# EAGLE board LilyPad-E-Sewing-Kit_Panel_v14 (EAGLE 7.5.0), part 1 of 2
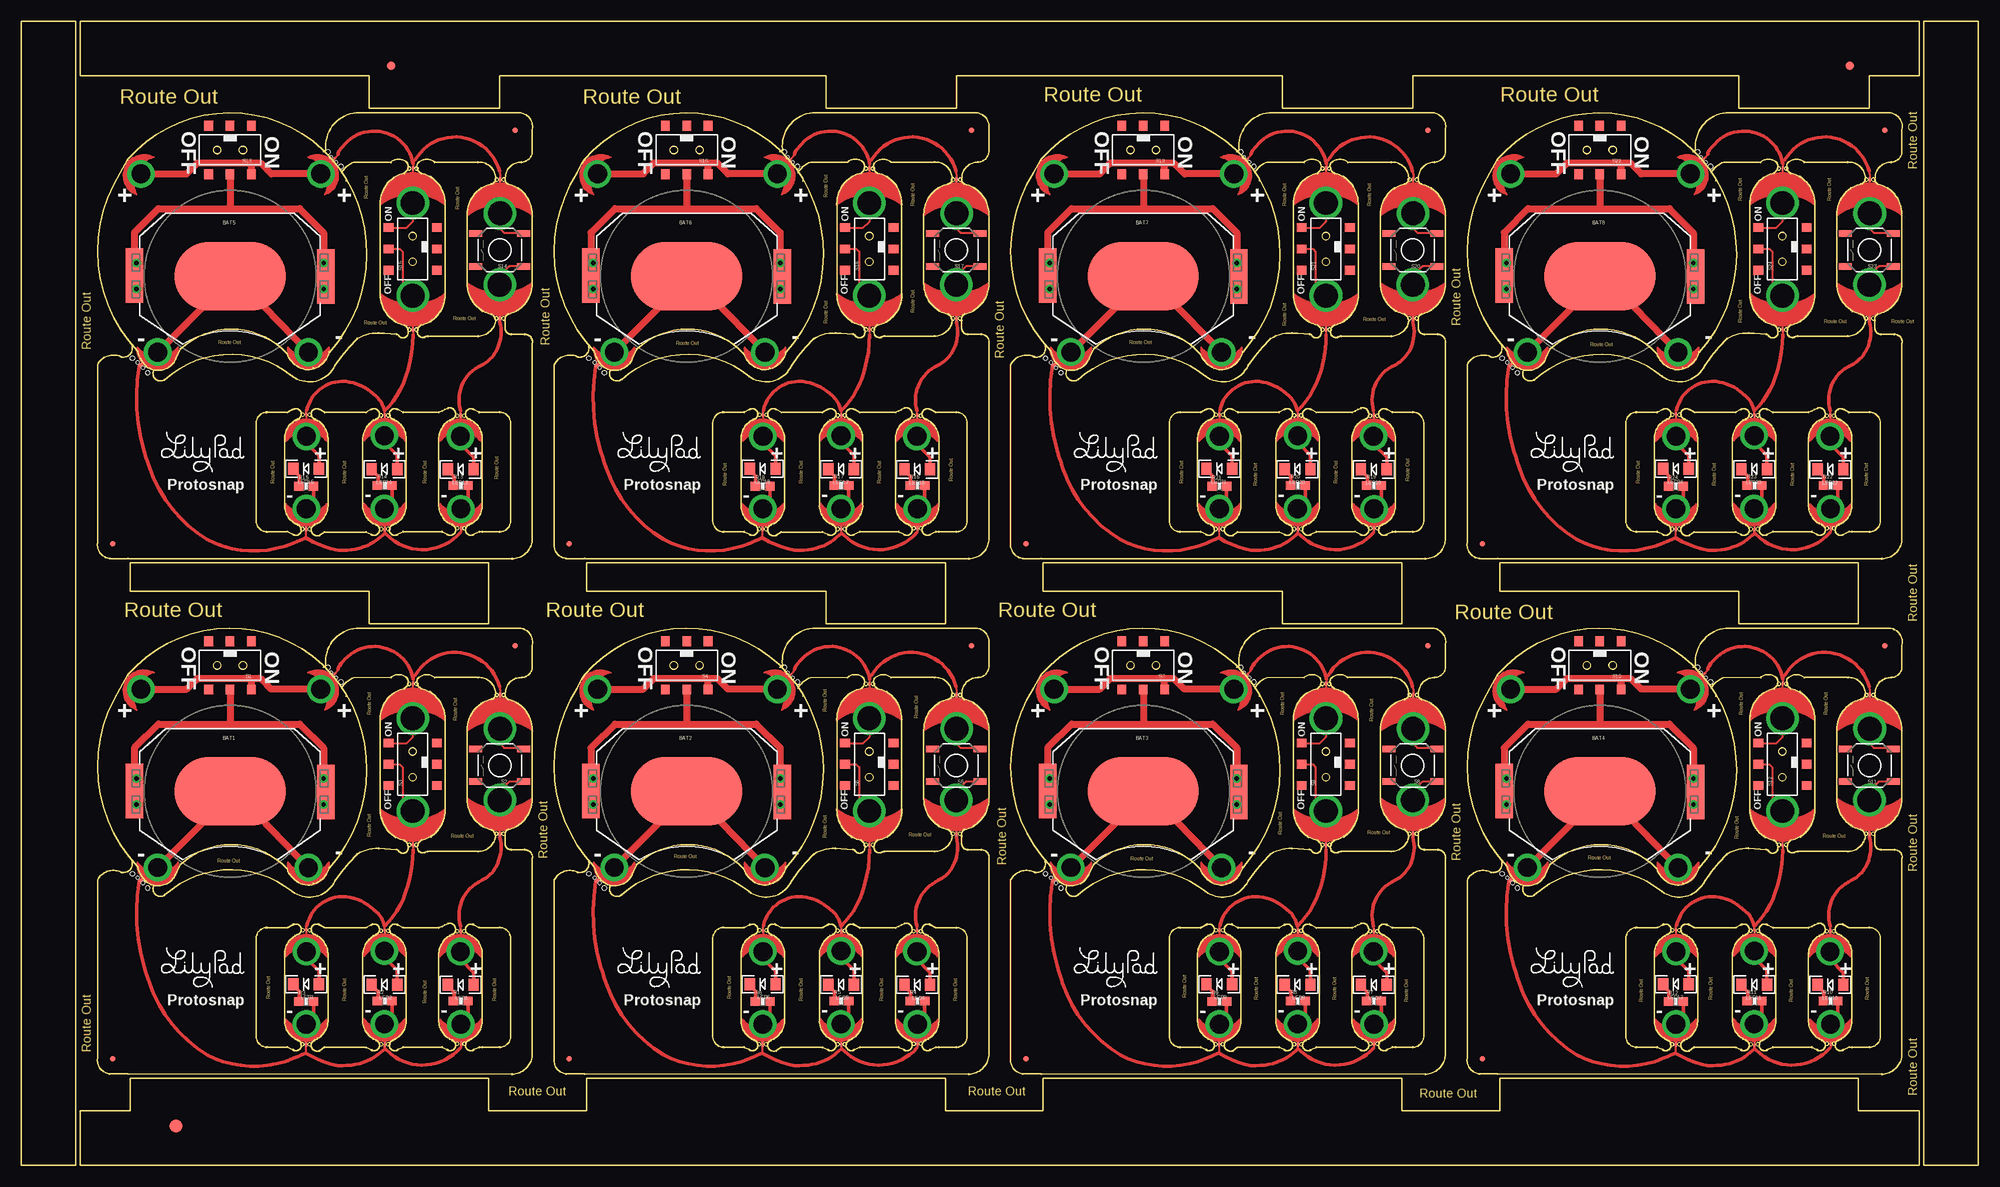
[diagram p0: board, top side]
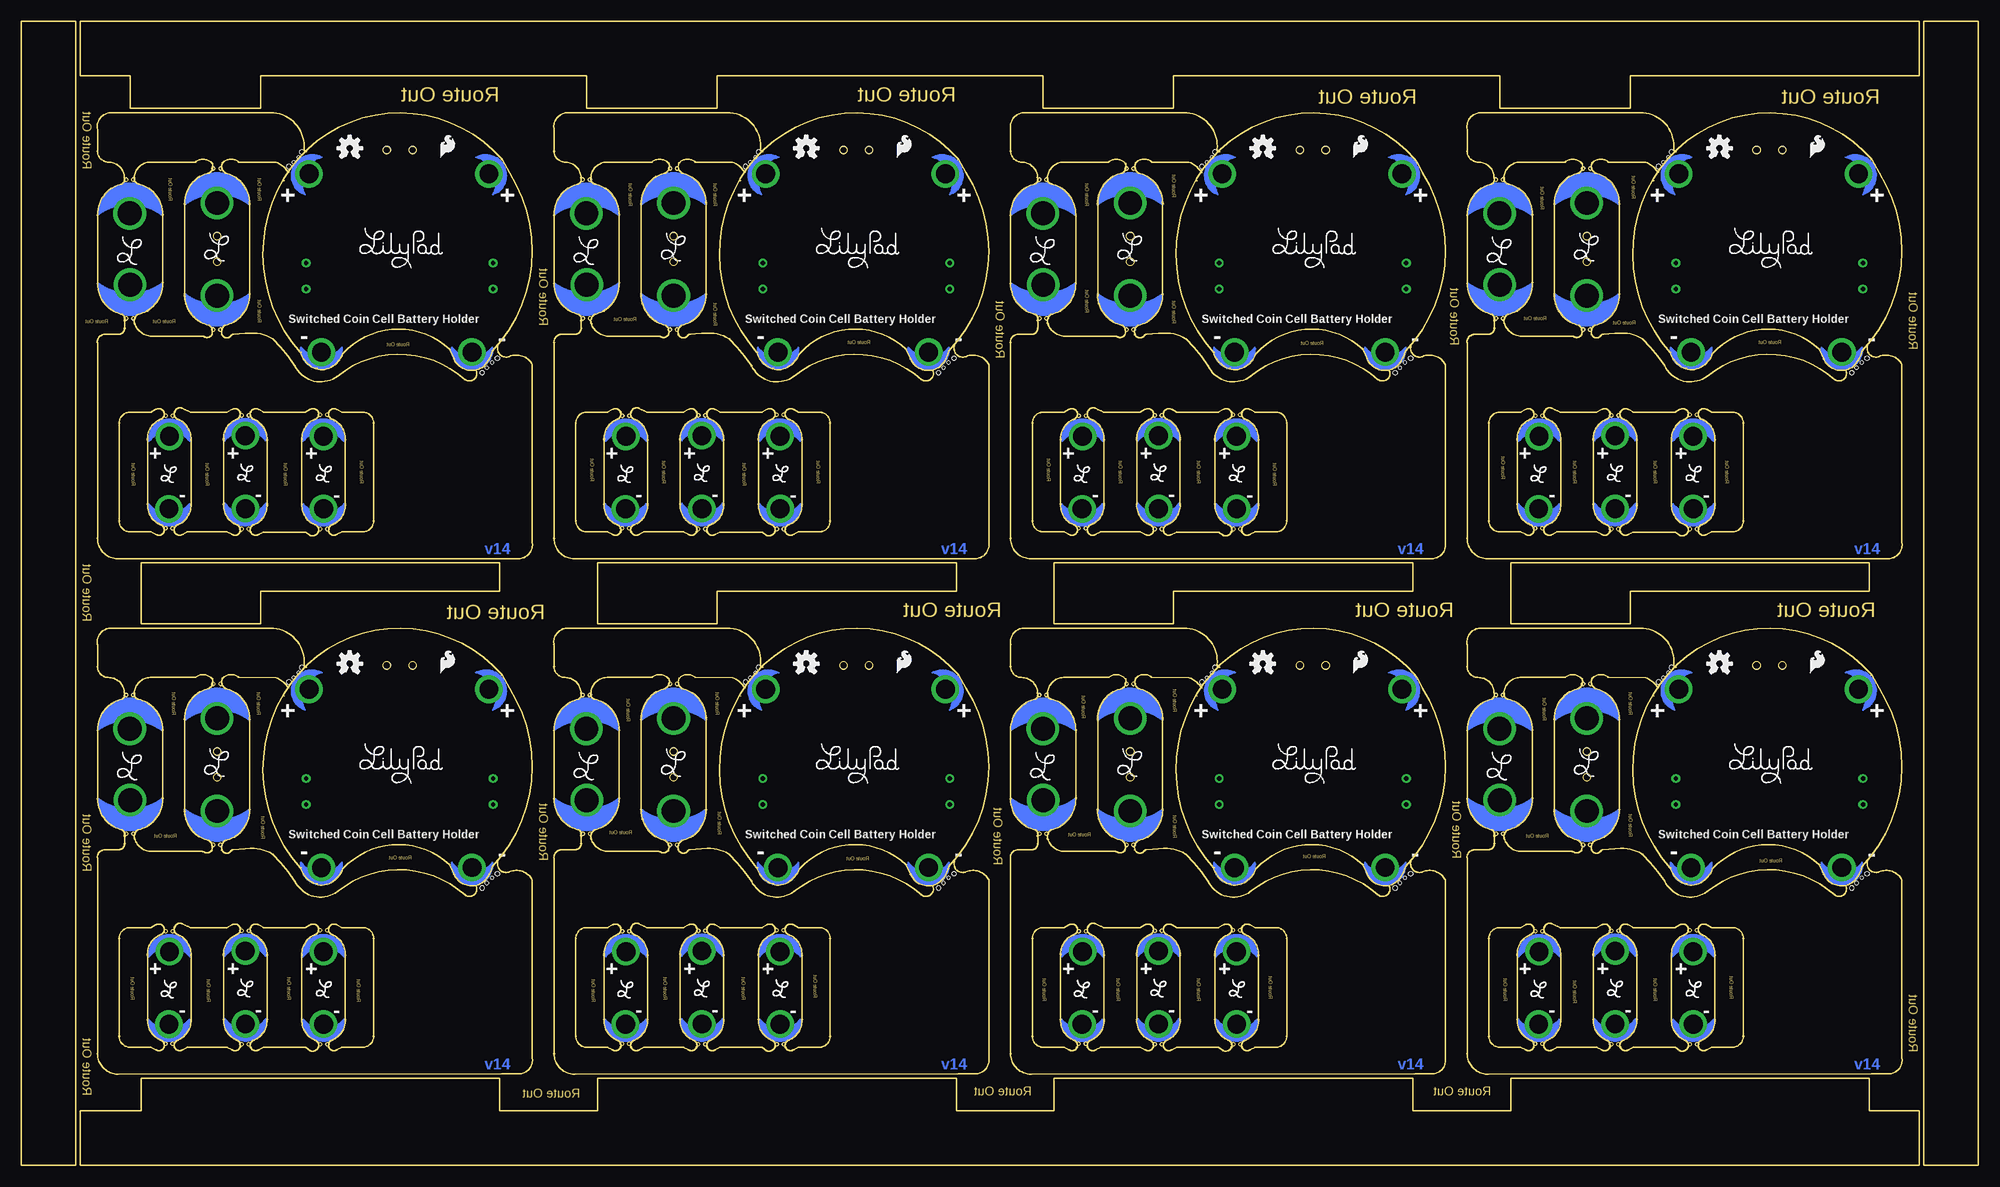
[diagram p1: board, bottom side, seen from below]

Size 228.6 x 133.6 mm. Coordinates in mm from the lower left corner, seen from the top.
Outline: 8671 segments
Outline: circle at 45.31,56.21 radius 0.19
Outline: circle at 46.15,56.21 radius 0.19
Outline: circle at 55.52,54.91 radius 0.19
Outline: circle at 56.36,54.91 radius 0.19
Outline: circle at 50.88,27.36 radius 0.19
Outline: circle at 51.71,27.36 radius 0.19
Outline: circle at 41.99,27.38 radius 0.19
Outline: circle at 42.82,27.38 radius 0.19
Outline: circle at 32.87,27.46 radius 0.19
Outline: circle at 33.71,27.46 radius 0.19
Outline: circle at 33.66,14.12 radius 0.19
Outline: circle at 32.82,14.12 radius 0.19
Outline: circle at 42.85,14.12 radius 0.19
Outline: circle at 42.01,14.12 radius 0.19
Outline: circle at 51.74,14.2 radius 0.19
Outline: circle at 50.9,14.2 radius 0.19
Outline: circle at 56.31,38.71 radius 0.19
Outline: circle at 55.47,38.71 radius 0.19
Outline: circle at 46.18,37.41 radius 0.19
Outline: circle at 45.34,37.41 radius 0.19
Copper layers (1*16): Top 0.035mm / dielectric 1.5mm / Bottom 0.035mm
Design rules "SparkFun-2-layer-STANDARD *": minimum track width 10mil, minimum drill 20mil, track to track 10mil, track to pad 8mil, pad to pad 8mil, via to via 10mil, smd to smd 8mil, copper to edge 8mil, drill to drill 8mil, minimum pad ring 10mil, minimum via ring 10mil, stop-mask expansion 4mil, vias tented up to drill 25mil, thermal gap 10mil
Net classes: 1 VCC: width 0.203 mm
Holes 0.51 mm at 12.96,34.05 14.77,32.37 35.81,58.14 37.32,56.45 66.3,34.05 68.11,32.37 89.15,58.14 90.66,56.45 119.64,34.05 121.45,32.37 142.49,58.14 144,56.45 172.98,34.05 174.79,32.37 195.83,58.14 197.34,56.45 12.96,94.25 14.77,92.57 35.81,118.34 37.32,116.65 66.3,94.25 68.11,92.57 89.15,118.34 90.66,116.65 119.64,94.25 121.45,92.57 142.49,118.34 144,116.65 172.98,94.25 174.79,92.57 195.83,118.34 197.34,116.65

## Footprints (pad centres in the part's own frame; a part is rotated, then mirrored left to right if it is on the bottom)
BATTCON_20MM_4LEGS = smd 13 x 8: NEGATIVE 0,0 | smd 2.032 x 3.175: POSITIVE@1 -11.176,1.651; POSITIVE@2 -11.176,-1.524; POSITIVE@3 11.176,1.524; POSITIVE@4 11.176,-1.651
PETAL-SMALL-2SIDE = drill 2.2: 1 0,0
PETAL-MEDIUM-2SIDE = drill 2.794: 1 0,-0.254
FIDUCIAL-1.5X3 = smd 1.5 x 1.5: 1 0,0
FIDUCIAL-1X2 = smd 1 x 1: 1 0,0
MICRO-FIDUCIAL = smd 0.635 x 0.635: 1 0,0
LED-1206 = smd 1.2 x 1.4: A -1.5,0; C 1.5,0
MOUST-BITE-1-(2_HOLES) = smd 0.203 x 0.508 bottom: P$1 -0.013,0 | hole 0.381: -0.432,0; 0.406,0
0603-RES = smd 1.1 x 1: 1 -0.85,0; 2 0.85,0
AYZ0202 = smd 1 x 1.15: 1 -2.5,2.825; 2 0,2.825; 3 2.5,2.825; 4 -2.5,-2.825; 5 0,-2.825; 6 2.5,-2.825 | hole 0.85: 1.5,0; -1.5,0
TACTILE-SWITCH-SMD = smd 1.524 x 0.762: 1 -2.794,1.905; 2 2.794,1.905; 3 -2.794,-1.905; 4 2.794,-1.905

## Placement (x,y rotation side)
BAT1  20mm coincell  [BATTCON_20MM_4LEGS]  24.38,43.66 0 top
BAT2  20mm coincell  [BATTCON_20MM_4LEGS]  77.72,43.66 0 top
BAT3  20mm coincell  [BATTCON_20MM_4LEGS]  131.06,43.66 0 top
BAT4  20mm coincell  [BATTCON_20MM_4LEGS]  184.4,43.66 0 top
BAT5  20mm coincell  [BATTCON_20MM_4LEGS]  24.38,103.86 0 top
BAT6  20mm coincell  [BATTCON_20MM_4LEGS]  77.72,103.86 0 top
BAT7  20mm coincell  [BATTCON_20MM_4LEGS]  131.06,103.86 0 top
BAT8  20mm coincell  [BATTCON_20MM_4LEGS]  184.4,103.86 0 top
BATB-  SEWTAP6  [PETAL-SMALL-2SIDE]  15.93,34.77 0 top
BATB-1  SEWTAP6  [PETAL-SMALL-2SIDE]  69.27,34.77 0 top
BATB-2  SEWTAP6  [PETAL-SMALL-2SIDE]  33.53,34.76 0 top
BATB-3  SEWTAP6  [PETAL-SMALL-2SIDE]  86.87,34.76 0 top
BATB-4  SEWTAP6  [PETAL-SMALL-2SIDE]  122.61,34.77 0 top
BATB-5  SEWTAP6  [PETAL-SMALL-2SIDE]  140.21,34.76 0 top
BATB-6  SEWTAP6  [PETAL-SMALL-2SIDE]  175.95,34.77 0 top
BATB-7  SEWTAP6  [PETAL-SMALL-2SIDE]  193.55,34.76 0 top
BATB-8  SEWTAP6  [PETAL-SMALL-2SIDE]  15.93,94.97 0 top
BATB-9  SEWTAP6  [PETAL-SMALL-2SIDE]  33.53,94.96 0 top
BATB-10  SEWTAP6  [PETAL-SMALL-2SIDE]  69.27,94.97 0 top
BATB-11  SEWTAP6  [PETAL-SMALL-2SIDE]  86.87,94.96 0 top
BATB-12  SEWTAP6  [PETAL-SMALL-2SIDE]  122.61,94.97 0 top
BATB-13  SEWTAP6  [PETAL-SMALL-2SIDE]  140.21,94.96 0 top
BATB-14  SEWTAP6  [PETAL-SMALL-2SIDE]  175.95,94.97 0 top
BATB-15  SEWTAP6  [PETAL-SMALL-2SIDE]  193.55,94.96 0 top
BATT+  SEWTAP6  [PETAL-SMALL-2SIDE]  13.97,55.6 245 top
BATT+1  SEWTAP6  [PETAL-SMALL-2SIDE]  67.31,55.6 245 top
BATT+2  SEWTAP6  [PETAL-SMALL-2SIDE]  34.98,55.6 115 top
BATT+3  SEWTAP6  [PETAL-SMALL-2SIDE]  88.32,55.6 115 top
BATT+4  SEWTAP6  [PETAL-SMALL-2SIDE]  120.65,55.6 245 top
BATT+5  SEWTAP6  [PETAL-SMALL-2SIDE]  141.66,55.6 115 top
BATT+6  SEWTAP6  [PETAL-SMALL-2SIDE]  173.99,55.6 245 top
BATT+7  SEWTAP6  [PETAL-SMALL-2SIDE]  195,55.6 115 top
BATT+8  SEWTAP6  [PETAL-SMALL-2SIDE]  13.97,115.8 245 top
BATT+9  SEWTAP6  [PETAL-SMALL-2SIDE]  34.98,115.8 115 top
BATT+10  SEWTAP6  [PETAL-SMALL-2SIDE]  67.31,115.8 245 top
BATT+11  SEWTAP6  [PETAL-SMALL-2SIDE]  88.32,115.8 115 top
BATT+12  SEWTAP6  [PETAL-SMALL-2SIDE]  120.65,115.8 245 top
BATT+13  SEWTAP6  [PETAL-SMALL-2SIDE]  141.66,115.8 115 top
BATT+14  SEWTAP6  [PETAL-SMALL-2SIDE]  173.99,115.8 245 top
BATT+15  SEWTAP6  [PETAL-SMALL-2SIDE]  195,115.8 115 top
BUTTON-  SEWTAP8  [PETAL-MEDIUM-2SIDE]  55.92,50.73 180 top
BUTTON-1  SEWTAP8  [PETAL-MEDIUM-2SIDE]  109.26,50.73 180 top
BUTTON-2  SEWTAP8  [PETAL-MEDIUM-2SIDE]  162.6,50.73 180 top
BUTTON-3  SEWTAP8  [PETAL-MEDIUM-2SIDE]  215.94,50.73 180 top
BUTTON-4  SEWTAP8  [PETAL-MEDIUM-2SIDE]  55.92,110.93 180 top
BUTTON-5  SEWTAP8  [PETAL-MEDIUM-2SIDE]  109.26,110.93 180 top
BUTTON-6  SEWTAP8  [PETAL-MEDIUM-2SIDE]  162.6,110.93 180 top
BUTTON-7  SEWTAP8  [PETAL-MEDIUM-2SIDE]  215.94,110.93 180 top
BUTTONS  SEWTAP8  [PETAL-MEDIUM-2SIDE]  55.88,42.9 0 top
BUTTONS1  SEWTAP8  [PETAL-MEDIUM-2SIDE]  109.22,42.9 0 top
BUTTONS2  SEWTAP8  [PETAL-MEDIUM-2SIDE]  162.56,42.9 0 top
BUTTONS3  SEWTAP8  [PETAL-MEDIUM-2SIDE]  215.9,42.9 0 top
BUTTONS4  SEWTAP8  [PETAL-MEDIUM-2SIDE]  55.88,103.1 0 top
BUTTONS5  SEWTAP8  [PETAL-MEDIUM-2SIDE]  109.22,103.1 0 top
BUTTONS6  SEWTAP8  [PETAL-MEDIUM-2SIDE]  162.56,103.1 0 top
BUTTONS7  SEWTAP8  [PETAL-MEDIUM-2SIDE]  215.9,103.1 0 top
E$1  [FIDUCIAL-1.5X3]  18.03,4.57 0 top
E$7  [FIDUCIAL-1X2]  213.61,128.4 90 top
E$8  [FIDUCIAL-1X2]  43.18,128.4 270 top
FD1  FIDUCIALUFIDUCIAL  [MICRO-FIDUCIAL]  57.66,60.68 0 top
FD2  FIDUCIALUFIDUCIAL  [MICRO-FIDUCIAL]  10.67,12.42 0 top
FD3  FIDUCIALUFIDUCIAL  [MICRO-FIDUCIAL]  111,60.68 0 top
FD4  FIDUCIALUFIDUCIAL  [MICRO-FIDUCIAL]  64.01,12.42 0 top
FD5  FIDUCIALUFIDUCIAL  [MICRO-FIDUCIAL]  164.34,60.68 0 top
FD6  FIDUCIALUFIDUCIAL  [MICRO-FIDUCIAL]  117.35,12.42 0 top
FD7  FIDUCIALUFIDUCIAL  [MICRO-FIDUCIAL]  217.68,60.68 0 top
FD8  FIDUCIALUFIDUCIAL  [MICRO-FIDUCIAL]  170.69,12.42 0 top
FD9  FIDUCIALUFIDUCIAL  [MICRO-FIDUCIAL]  57.66,120.88 0 top
FD10  FIDUCIALUFIDUCIAL  [MICRO-FIDUCIAL]  10.67,72.62 0 top
FD11  FIDUCIALUFIDUCIAL  [MICRO-FIDUCIAL]  111,120.88 0 top
FD12  FIDUCIALUFIDUCIAL  [MICRO-FIDUCIAL]  64.01,72.62 0 top
FD13  FIDUCIALUFIDUCIAL  [MICRO-FIDUCIAL]  164.34,120.88 0 top
FD14  FIDUCIALUFIDUCIAL  [MICRO-FIDUCIAL]  117.35,72.62 0 top
FD15  FIDUCIALUFIDUCIAL  [MICRO-FIDUCIAL]  217.68,120.88 0 top
FD16  FIDUCIALUFIDUCIAL  [MICRO-FIDUCIAL]  170.69,72.62 0 top
LED1  WHITE  [LED-1206]  51.33,21.07 180 top
LED2  WHITE  [LED-1206]  42.42,21.11 180 top
LED3  WHITE  [LED-1206]  33.27,21.16 180 top
LED4  WHITE  [LED-1206]  104.67,21.07 180 top
LED5  WHITE  [LED-1206]  95.76,21.11 180 top
LED6  WHITE  [LED-1206]  86.61,21.16 180 top
LED7  WHITE  [LED-1206]  158.01,21.07 180 top
LED8  WHITE  [LED-1206]  149.1,21.11 180 top
LED9  WHITE  [LED-1206]  139.95,21.16 180 top
LED10  WHITE  [LED-1206]  211.35,21.07 180 top
LED11  WHITE  [LED-1206]  202.44,21.11 180 top
LED12  WHITE  [LED-1206]  193.29,21.16 180 top
LED13  WHITE  [LED-1206]  51.33,81.27 180 top
LED14  WHITE  [LED-1206]  42.42,81.31 180 top
LED15  WHITE  [LED-1206]  33.27,81.36 180 top
LED16  WHITE  [LED-1206]  104.67,81.27 180 top
LED17  WHITE  [LED-1206]  95.76,81.31 180 top
LED18  WHITE  [LED-1206]  86.61,81.36 180 top
LED19  WHITE  [LED-1206]  158.01,81.27 180 top
LED20  WHITE  [LED-1206]  149.1,81.31 180 top
LED21  WHITE  [LED-1206]  139.95,81.36 180 top
LED22  WHITE  [LED-1206]  211.35,81.27 180 top
LED23  WHITE  [LED-1206]  202.44,81.31 180 top
LED24  WHITE  [LED-1206]  193.29,81.36 180 top
LED+1  SEWTAP6  [PETAL-SMALL-2SIDE]  51.28,24.94 180 top
LED+2  SEWTAP6  [PETAL-SMALL-2SIDE]  42.42,25.02 180 top
LED+3  SEWTAP6  [PETAL-SMALL-2SIDE]  33.3,24.94 180 top
LED+4  SEWTAP6  [PETAL-SMALL-2SIDE]  104.62,24.94 180 top
LED+5  SEWTAP6  [PETAL-SMALL-2SIDE]  95.76,25.02 180 top
LED+6  SEWTAP6  [PETAL-SMALL-2SIDE]  86.64,24.94 180 top
LED+7  SEWTAP6  [PETAL-SMALL-2SIDE]  157.96,24.94 180 top
LED+8  SEWTAP6  [PETAL-SMALL-2SIDE]  149.1,25.02 180 top
LED+9  SEWTAP6  [PETAL-SMALL-2SIDE]  139.98,24.94 180 top
LED+10  SEWTAP6  [PETAL-SMALL-2SIDE]  211.3,24.94 180 top
LED+11  SEWTAP6  [PETAL-SMALL-2SIDE]  202.44,25.02 180 top
LED+12  SEWTAP6  [PETAL-SMALL-2SIDE]  193.32,24.94 180 top
LED+13  SEWTAP6  [PETAL-SMALL-2SIDE]  51.28,85.14 180 top
LED+14  SEWTAP6  [PETAL-SMALL-2SIDE]  42.42,85.22 180 top
LED+15  SEWTAP6  [PETAL-SMALL-2SIDE]  33.3,85.14 180 top
LED+16  SEWTAP6  [PETAL-SMALL-2SIDE]  104.62,85.14 180 top
LED+17  SEWTAP6  [PETAL-SMALL-2SIDE]  95.76,85.22 180 top
LED+18  SEWTAP6  [PETAL-SMALL-2SIDE]  86.64,85.14 180 top
LED+19  SEWTAP6  [PETAL-SMALL-2SIDE]  157.96,85.14 180 top
LED+20  SEWTAP6  [PETAL-SMALL-2SIDE]  149.1,85.22 180 top
LED+21  SEWTAP6  [PETAL-SMALL-2SIDE]  139.98,85.14 180 top
LED+22  SEWTAP6  [PETAL-SMALL-2SIDE]  211.3,85.14 180 top
LED+23  SEWTAP6  [PETAL-SMALL-2SIDE]  202.44,85.22 180 top
LED+24  SEWTAP6  [PETAL-SMALL-2SIDE]  193.32,85.14 180 top
LED-1  SEWTAP6  [PETAL-SMALL-2SIDE]  51.34,16.47 0 top
LED-2  SEWTAP6  [PETAL-SMALL-2SIDE]  42.41,16.5 0 top
LED-3  SEWTAP6  [PETAL-SMALL-2SIDE]  33.27,16.48 0 top
LED-4  SEWTAP6  [PETAL-SMALL-2SIDE]  104.68,16.47 0 top
LED-5  SEWTAP6  [PETAL-SMALL-2SIDE]  95.75,16.5 0 top
LED-6  SEWTAP6  [PETAL-SMALL-2SIDE]  86.61,16.48 0 top
LED-7  SEWTAP6  [PETAL-SMALL-2SIDE]  158.02,16.47 0 top
LED-8  SEWTAP6  [PETAL-SMALL-2SIDE]  149.09,16.5 0 top
LED-9  SEWTAP6  [PETAL-SMALL-2SIDE]  139.95,16.48 0 top
LED-10  SEWTAP6  [PETAL-SMALL-2SIDE]  211.36,16.47 0 top
LED-11  SEWTAP6  [PETAL-SMALL-2SIDE]  202.43,16.5 0 top
LED-12  SEWTAP6  [PETAL-SMALL-2SIDE]  193.29,16.48 0 top
LED-13  SEWTAP6  [PETAL-SMALL-2SIDE]  51.34,76.67 0 top
LED-14  SEWTAP6  [PETAL-SMALL-2SIDE]  42.41,76.7 0 top
LED-15  SEWTAP6  [PETAL-SMALL-2SIDE]  33.27,76.68 0 top
LED-16  SEWTAP6  [PETAL-SMALL-2SIDE]  104.68,76.67 0 top
LED-17  SEWTAP6  [PETAL-SMALL-2SIDE]  95.75,76.7 0 top
LED-18  SEWTAP6  [PETAL-SMALL-2SIDE]  86.61,76.68 0 top
LED-19  SEWTAP6  [PETAL-SMALL-2SIDE]  158.02,76.67 0 top
LED-20  SEWTAP6  [PETAL-SMALL-2SIDE]  149.09,76.7 0 top
LED-21  SEWTAP6  [PETAL-SMALL-2SIDE]  139.95,76.68 0 top
LED-22  SEWTAP6  [PETAL-SMALL-2SIDE]  211.36,76.67 0 top
LED-23  SEWTAP6  [PETAL-SMALL-2SIDE]  202.43,76.7 0 top
LED-24  SEWTAP6  [PETAL-SMALL-2SIDE]  193.29,76.68 0 top
LOGO1  SFE_LOGO_FLAME.1_INCH  [SFE_LOGO_FLAME_.1]  19.94,57.18 0 bottom
LOGO2  OSHW-LOGOS  [OSHW-LOGO-S]  30.23,58.6 0 bottom
LOGO3  SFE_LOGO_FLAME.1_INCH  [SFE_LOGO_FLAME_.1]  73.28,57.18 0 bottom
LOGO4  OSHW-LOGOS  [OSHW-LOGO-S]  83.57,58.6 0 bottom
LOGO5  SFE_LOGO_FLAME.1_INCH  [SFE_LOGO_FLAME_.1]  126.62,57.18 0 bottom
LOGO6  OSHW-LOGOS  [OSHW-LOGO-S]  136.91,58.6 0 bottom
LOGO7  SFE_LOGO_FLAME.1_INCH  [SFE_LOGO_FLAME_.1]  179.96,57.18 0 bottom
LOGO8  OSHW-LOGOS  [OSHW-LOGO-S]  190.25,58.6 0 bottom
LOGO9  SFE_LOGO_FLAME.1_INCH  [SFE_LOGO_FLAME_.1]  19.94,117.37 0 bottom
LOGO10  OSHW-LOGOS  [OSHW-LOGO-S]  30.23,118.8 0 bottom
LOGO11  SFE_LOGO_FLAME.1_INCH  [SFE_LOGO_FLAME_.1]  73.28,117.37 0 bottom
LOGO12  OSHW-LOGOS  [OSHW-LOGO-S]  83.57,118.8 0 bottom
LOGO13  SFE_LOGO_FLAME.1_INCH  [SFE_LOGO_FLAME_.1]  126.62,117.37 0 bottom
LOGO14  OSHW-LOGOS  [OSHW-LOGO-S]  136.91,118.8 0 bottom
LOGO15  SFE_LOGO_FLAME.1_INCH  [SFE_LOGO_FLAME_.1]  179.96,117.37 0 bottom
LOGO16  OSHW-LOGOS  [OSHW-LOGO-S]  190.25,118.8 0 bottom
MB1  MOUSE-BITE-12_HOLES  [MOUST-BITE-1-(2_HOLES)]  45.72,56.24 0 bottom
MB2  MOUSE-BITE-12_HOLES  [MOUST-BITE-1-(2_HOLES)]  55.91,54.94 0 bottom
MB3  MOUSE-BITE-12_HOLES  [MOUST-BITE-1-(2_HOLES)]  51.31,27.36 0 bottom
MB4  MOUSE-BITE-12_HOLES  [MOUST-BITE-1-(2_HOLES)]  42.44,27.38 0 bottom
MB5  MOUSE-BITE-12_HOLES  [MOUST-BITE-1-(2_HOLES)]  33.27,27.46 0 bottom
MB6  MOUSE-BITE-12_HOLES  [MOUST-BITE-1-(2_HOLES)]  33.25,14.12 0 bottom
MB7  MOUSE-BITE-12_HOLES  [MOUST-BITE-1-(2_HOLES)]  42.44,14.12 0 bottom
MB8  MOUSE-BITE-12_HOLES  [MOUST-BITE-1-(2_HOLES)]  51.33,14.2 0 bottom
MB9  MOUSE-BITE-12_HOLES  [MOUST-BITE-1-(2_HOLES)]  55.91,38.71 0 bottom
MB10  MOUSE-BITE-12_HOLES  [MOUST-BITE-1-(2_HOLES)]  45.75,37.41 180 bottom
MB11  MOUSE-BITE-12_HOLES  [MOUST-BITE-1-(2_HOLES)]  99.06,56.24 0 bottom
MB12  MOUSE-BITE-12_HOLES  [MOUST-BITE-1-(2_HOLES)]  99.09,37.41 180 bottom
MB13  MOUSE-BITE-12_HOLES  [MOUST-BITE-1-(2_HOLES)]  109.25,54.94 0 bottom
MB14  MOUSE-BITE-12_HOLES  [MOUST-BITE-1-(2_HOLES)]  104.65,27.36 0 bottom
MB15  MOUSE-BITE-12_HOLES  [MOUST-BITE-1-(2_HOLES)]  95.78,27.38 0 bottom
MB16  MOUSE-BITE-12_HOLES  [MOUST-BITE-1-(2_HOLES)]  86.61,27.46 0 bottom
MB17  MOUSE-BITE-12_HOLES  [MOUST-BITE-1-(2_HOLES)]  86.59,14.12 0 bottom
MB18  MOUSE-BITE-12_HOLES  [MOUST-BITE-1-(2_HOLES)]  95.78,14.12 0 bottom
MB19  MOUSE-BITE-12_HOLES  [MOUST-BITE-1-(2_HOLES)]  104.67,14.2 0 bottom
MB20  MOUSE-BITE-12_HOLES  [MOUST-BITE-1-(2_HOLES)]  109.25,38.71 0 bottom
MB21  MOUSE-BITE-12_HOLES  [MOUST-BITE-1-(2_HOLES)]  152.4,56.24 0 bottom
MB22  MOUSE-BITE-12_HOLES  [MOUST-BITE-1-(2_HOLES)]  152.43,37.41 180 bottom
MB23  MOUSE-BITE-12_HOLES  [MOUST-BITE-1-(2_HOLES)]  162.59,54.94 0 bottom
MB24  MOUSE-BITE-12_HOLES  [MOUST-BITE-1-(2_HOLES)]  157.99,27.36 0 bottom
MB25  MOUSE-BITE-12_HOLES  [MOUST-BITE-1-(2_HOLES)]  149.12,27.38 0 bottom
MB26  MOUSE-BITE-12_HOLES  [MOUST-BITE-1-(2_HOLES)]  139.95,27.46 0 bottom
MB27  MOUSE-BITE-12_HOLES  [MOUST-BITE-1-(2_HOLES)]  139.93,14.12 0 bottom
MB28  MOUSE-BITE-12_HOLES  [MOUST-BITE-1-(2_HOLES)]  149.12,14.12 0 bottom
MB29  MOUSE-BITE-12_HOLES  [MOUST-BITE-1-(2_HOLES)]  158.01,14.2 0 bottom
MB30  MOUSE-BITE-12_HOLES  [MOUST-BITE-1-(2_HOLES)]  162.59,38.71 0 bottom
MB31  MOUSE-BITE-12_HOLES  [MOUST-BITE-1-(2_HOLES)]  205.74,56.24 0 bottom
MB32  MOUSE-BITE-12_HOLES  [MOUST-BITE-1-(2_HOLES)]  205.77,37.41 180 bottom
MB33  MOUSE-BITE-12_HOLES  [MOUST-BITE-1-(2_HOLES)]  215.93,54.94 0 bottom
MB34  MOUSE-BITE-12_HOLES  [MOUST-BITE-1-(2_HOLES)]  211.33,27.36 0 bottom
MB35  MOUSE-BITE-12_HOLES  [MOUST-BITE-1-(2_HOLES)]  202.46,27.38 0 bottom
MB36  MOUSE-BITE-12_HOLES  [MOUST-BITE-1-(2_HOLES)]  193.29,27.46 0 bottom
MB37  MOUSE-BITE-12_HOLES  [MOUST-BITE-1-(2_HOLES)]  193.27,14.12 0 bottom
MB38  MOUSE-BITE-12_HOLES  [MOUST-BITE-1-(2_HOLES)]  202.46,14.12 0 bottom
MB39  MOUSE-BITE-12_HOLES  [MOUST-BITE-1-(2_HOLES)]  211.35,14.2 0 bottom
MB40  MOUSE-BITE-12_HOLES  [MOUST-BITE-1-(2_HOLES)]  215.93,38.71 0 bottom
MB41  MOUSE-BITE-12_HOLES  [MOUST-BITE-1-(2_HOLES)]  45.72,116.43 0 bottom
MB42  MOUSE-BITE-12_HOLES  [MOUST-BITE-1-(2_HOLES)]  45.75,97.61 180 bottom
MB43  MOUSE-BITE-12_HOLES  [MOUST-BITE-1-(2_HOLES)]  55.91,115.14 0 bottom
MB44  MOUSE-BITE-12_HOLES  [MOUST-BITE-1-(2_HOLES)]  51.31,87.55 0 bottom
MB45  MOUSE-BITE-12_HOLES  [MOUST-BITE-1-(2_HOLES)]  42.44,87.58 0 bottom
MB46  MOUSE-BITE-12_HOLES  [MOUST-BITE-1-(2_HOLES)]  33.27,87.66 0 bottom
MB47  MOUSE-BITE-12_HOLES  [MOUST-BITE-1-(2_HOLES)]  33.25,74.32 0 bottom
MB48  MOUSE-BITE-12_HOLES  [MOUST-BITE-1-(2_HOLES)]  42.44,74.32 0 bottom
MB49  MOUSE-BITE-12_HOLES  [MOUST-BITE-1-(2_HOLES)]  51.33,74.4 0 bottom
MB50  MOUSE-BITE-12_HOLES  [MOUST-BITE-1-(2_HOLES)]  55.91,98.91 0 bottom
MB51  MOUSE-BITE-12_HOLES  [MOUST-BITE-1-(2_HOLES)]  99.06,116.43 0 bottom
MB52  MOUSE-BITE-12_HOLES  [MOUST-BITE-1-(2_HOLES)]  99.09,97.61 180 bottom
MB53  MOUSE-BITE-12_HOLES  [MOUST-BITE-1-(2_HOLES)]  109.25,115.14 0 bottom
MB54  MOUSE-BITE-12_HOLES  [MOUST-BITE-1-(2_HOLES)]  104.65,87.55 0 bottom
MB55  MOUSE-BITE-12_HOLES  [MOUST-BITE-1-(2_HOLES)]  95.78,87.58 0 bottom
MB56  MOUSE-BITE-12_HOLES  [MOUST-BITE-1-(2_HOLES)]  86.61,87.66 0 bottom
MB57  MOUSE-BITE-12_HOLES  [MOUST-BITE-1-(2_HOLES)]  86.59,74.32 0 bottom
MB58  MOUSE-BITE-12_HOLES  [MOUST-BITE-1-(2_HOLES)]  95.78,74.32 0 bottom
MB59  MOUSE-BITE-12_HOLES  [MOUST-BITE-1-(2_HOLES)]  104.67,74.4 0 bottom
MB60  MOUSE-BITE-12_HOLES  [MOUST-BITE-1-(2_HOLES)]  109.25,98.91 0 bottom
MB61  MOUSE-BITE-12_HOLES  [MOUST-BITE-1-(2_HOLES)]  152.4,116.43 0 bottom
MB62  MOUSE-BITE-12_HOLES  [MOUST-BITE-1-(2_HOLES)]  152.43,97.61 180 bottom
MB63  MOUSE-BITE-12_HOLES  [MOUST-BITE-1-(2_HOLES)]  162.59,115.14 0 bottom
MB64  MOUSE-BITE-12_HOLES  [MOUST-BITE-1-(2_HOLES)]  157.99,87.55 0 bottom
MB65  MOUSE-BITE-12_HOLES  [MOUST-BITE-1-(2_HOLES)]  149.12,87.58 0 bottom
MB66  MOUSE-BITE-12_HOLES  [MOUST-BITE-1-(2_HOLES)]  139.95,87.66 0 bottom
MB67  MOUSE-BITE-12_HOLES  [MOUST-BITE-1-(2_HOLES)]  139.93,74.32 0 bottom
MB68  MOUSE-BITE-12_HOLES  [MOUST-BITE-1-(2_HOLES)]  149.12,74.32 0 bottom
MB69  MOUSE-BITE-12_HOLES  [MOUST-BITE-1-(2_HOLES)]  158.01,74.4 0 bottom
MB70  MOUSE-BITE-12_HOLES  [MOUST-BITE-1-(2_HOLES)]  162.59,98.91 0 bottom
MB71  MOUSE-BITE-12_HOLES  [MOUST-BITE-1-(2_HOLES)]  205.74,116.43 0 bottom
MB72  MOUSE-BITE-12_HOLES  [MOUST-BITE-1-(2_HOLES)]  205.77,97.61 180 bottom
MB73  MOUSE-BITE-12_HOLES  [MOUST-BITE-1-(2_HOLES)]  215.93,115.14 0 bottom
MB74  MOUSE-BITE-12_HOLES  [MOUST-BITE-1-(2_HOLES)]  211.33,87.55 0 bottom
MB75  MOUSE-BITE-12_HOLES  [MOUST-BITE-1-(2_HOLES)]  202.46,87.58 0 bottom
MB76  MOUSE-BITE-12_HOLES  [MOUST-BITE-1-(2_HOLES)]  193.29,87.66 0 bottom
MB77  MOUSE-BITE-12_HOLES  [MOUST-BITE-1-(2_HOLES)]  193.27,74.32 0 bottom
MB78  MOUSE-BITE-12_HOLES  [MOUST-BITE-1-(2_HOLES)]  202.46,74.32 0 bottom
MB79  MOUSE-BITE-12_HOLES  [MOUST-BITE-1-(2_HOLES)]  211.35,74.4 0 bottom
MB80  MOUSE-BITE-12_HOLES  [MOUST-BITE-1-(2_HOLES)]  215.93,98.91 0 bottom
MB+  MOUSE-BITE-12_HOLES  [MOUST-BITE-1-(2_HOLES)]  36.47,57.23 225 bottom
MB+1  MOUSE-BITE-12_HOLES  [MOUST-BITE-1-(2_HOLES)]  89.81,57.23 225 bottom
MB+2  MOUSE-BITE-12_HOLES  [MOUST-BITE-1-(2_HOLES)]  143.15,57.23 225 bottom
MB+3  MOUSE-BITE-12_HOLES  [MOUST-BITE-1-(2_HOLES)]  196.49,57.23 225 bottom
MB+4  MOUSE-BITE-12_HOLES  [MOUST-BITE-1-(2_HOLES)]  36.47,117.42 225 bottom
MB+5  MOUSE-BITE-12_HOLES  [MOUST-BITE-1-(2_HOLES)]  89.81,117.42 225 bottom
MB+6  MOUSE-BITE-12_HOLES  [MOUST-BITE-1-(2_HOLES)]  143.15,117.42 225 bottom
MB+7  MOUSE-BITE-12_HOLES  [MOUST-BITE-1-(2_HOLES)]  196.49,117.42 225 bottom
MB-  MOUSE-BITE-12_HOLES  [MOUST-BITE-1-(2_HOLES)]  13.89,33.27 45 bottom
MB-1  MOUSE-BITE-12_HOLES  [MOUST-BITE-1-(2_HOLES)]  67.23,33.27 45 bottom
MB-2  MOUSE-BITE-12_HOLES  [MOUST-BITE-1-(2_HOLES)]  120.57,33.27 45 bottom
MB-3  MOUSE-BITE-12_HOLES  [MOUST-BITE-1-(2_HOLES)]  173.91,33.27 45 bottom
MB-4  MOUSE-BITE-12_HOLES  [MOUST-BITE-1-(2_HOLES)]  13.89,93.47 45 bottom
MB-5  MOUSE-BITE-12_HOLES  [MOUST-BITE-1-(2_HOLES)]  67.23,93.47 45 bottom
MB-6  MOUSE-BITE-12_HOLES  [MOUST-BITE-1-(2_HOLES)]  120.57,93.47 45 bottom
MB-7  MOUSE-BITE-12_HOLES  [MOUST-BITE-1-(2_HOLES)]  173.91,93.47 45 bottom
R1  150  [0603-RES]  51.34,19.18 0 top
R2  150  [0603-RES]  42.46,19.19 0 top
R3  150  [0603-RES]  33.27,19.11 0 top
R4  150  [0603-RES]  104.68,19.18 0 top
R5  150  [0603-RES]  95.8,19.19 0 top
R6  150  [0603-RES]  86.61,19.11 0 top
R7  150  [0603-RES]  158.02,19.18 0 top
R8  150  [0603-RES]  149.14,19.19 0 top
R9  150  [0603-RES]  139.95,19.11 0 top
R10  150  [0603-RES]  211.36,19.18 0 top
R11  150  [0603-RES]  202.48,19.19 0 top
R12  150  [0603-RES]  193.29,19.11 0 top
R13  150  [0603-RES]  51.34,79.38 0 top
R14  150  [0603-RES]  42.46,79.39 0 top
R15  150  [0603-RES]  33.27,79.31 0 top
R16  150  [0603-RES]  104.68,79.38 0 top
R17  150  [0603-RES]  95.8,79.39 0 top
R18  150  [0603-RES]  86.61,79.31 0 top
R19  150  [0603-RES]  158.02,79.38 0 top
R20  150  [0603-RES]  149.14,79.39 0 top
R21  150  [0603-RES]  139.95,79.31 0 top
R22  150  [0603-RES]  211.36,79.38 0 top
R23  150  [0603-RES]  202.48,79.39 0 top
R24  150  [0603-RES]  193.29,79.31 0 top
S1  S1  [AYZ0202]  24.38,58.39 180 top
S2  SWITCH-MOMENTARY-2SMD  [TACTILE-SWITCH-SMD]  55.88,46.71 180 top
S3  S3  [AYZ0202]  45.72,46.84 90 top
S4  S1  [AYZ0202]  77.72,58.39 180 top
S5  SWITCH-MOMENTARY-2SMD  [TACTILE-SWITCH-SMD]  109.22,46.71 180 top
S6  S3  [AYZ0202]  99.06,46.84 90 top
S7  S1  [AYZ0202]  131.06,58.39 180 top
S8  SWITCH-MOMENTARY-2SMD  [TACTILE-SWITCH-SMD]  162.56,46.71 180 top
S9  S3  [AYZ0202]  152.4,46.84 90 top
S10  S1  [AYZ0202]  184.4,58.39 180 top
S11  SWITCH-MOMENTARY-2SMD  [TACTILE-SWITCH-SMD]  215.9,46.71 180 top
S12  S3  [AYZ0202]  205.74,46.84 90 top
S13  S1  [AYZ0202]  24.38,118.59 180 top
S14  SWITCH-MOMENTARY-2SMD  [TACTILE-SWITCH-SMD]  55.88,106.91 180 top
S15  S3  [AYZ0202]  45.72,107.04 90 top
S16  S1  [AYZ0202]  77.72,118.59 180 top
S17  SWITCH-MOMENTARY-2SMD  [TACTILE-SWITCH-SMD]  109.22,106.91 180 top
S18  S3  [AYZ0202]  99.06,107.04 90 top
S19  S1  [AYZ0202]  131.06,118.59 180 top
S20  SWITCH-MOMENTARY-2SMD  [TACTILE-SWITCH-SMD]  162.56,106.91 180 top
S21  S3  [AYZ0202]  152.4,107.04 90 top
S22  S1  [AYZ0202]  184.4,118.59 180 top
S23  SWITCH-MOMENTARY-2SMD  [TACTILE-SWITCH-SMD]  215.9,106.91 180 top
S24  S3  [AYZ0202]  205.74,107.04 90 top
SLIDEOFF  SEWTAP8  [PETAL-MEDIUM-2SIDE]  45.72,41.63 0 top
SLIDEOFF1  SEWTAP8  [PETAL-MEDIUM-2SIDE]  99.06,41.63 0 top
SLIDEOFF2  SEWTAP8  [PETAL-MEDIUM-2SIDE]  152.4,41.63 0 top
SLIDEOFF3  SEWTAP8  [PETAL-MEDIUM-2SIDE]  205.74,41.63 0 top
SLIDEOFF4  SEWTAP8  [PETAL-MEDIUM-2SIDE]  45.72,101.83 0 top
SLIDEOFF5  SEWTAP8  [PETAL-MEDIUM-2SIDE]  99.06,101.83 0 top
SLIDEOFF6  SEWTAP8  [PETAL-MEDIUM-2SIDE]  152.4,101.83 0 top
SLIDEOFF7  SEWTAP8  [PETAL-MEDIUM-2SIDE]  205.74,101.83 0 top
SLIDEON  SEWTAP8  [PETAL-MEDIUM-2SIDE]  45.72,51.94 180 top
SLIDEON1  SEWTAP8  [PETAL-MEDIUM-2SIDE]  99.06,51.94 180 top
SLIDEON2  SEWTAP8  [PETAL-MEDIUM-2SIDE]  152.4,51.94 180 top
SLIDEON3  SEWTAP8  [PETAL-MEDIUM-2SIDE]  205.74,51.94 180 top
SLIDEON4  SEWTAP8  [PETAL-MEDIUM-2SIDE]  45.72,112.14 180 top
SLIDEON5  SEWTAP8  [PETAL-MEDIUM-2SIDE]  99.06,112.14 180 top
SLIDEON6  SEWTAP8  [PETAL-MEDIUM-2SIDE]  152.4,112.14 180 top
SLIDEON7  SEWTAP8  [PETAL-MEDIUM-2SIDE]  205.74,112.14 180 top
U$1  [LOGO-LILYPAD]  74.55,23.44 0 top
U$2  [LOGO-LILYPAD]  21.21,23.44 0 top
U$3  [LOGO-LILYPAD]  24.18,47.27 0 bottom
U$4  [LOGO-L-TINY]  51.35,20.58 0 bottom
U$5  [LOGO-L]  45.78,47.02 0 bottom
U$6  [LOGO-L]  55.97,46.64 0 bottom
U$7  [LOGO-L-TINY]  33.23,20.63 0 bottom
U$8  [LOGO-L-TINY]  42.41,20.69 0 bottom
U$9  [LOGO-LILYPAD]  77.52,47.27 0 bottom
U$10  [LOGO-L-TINY]  104.69,20.58 0 bottom
U$11  [LOGO-L-TINY]  86.57,20.63 0 bottom
U$12  [LOGO-L-TINY]  95.75,20.69 0 bottom
U$13  [LOGO-L]  99.12,47.02 0 bottom
U$14  [LOGO-L]  109.31,46.64 0 bottom
U$15  [LOGO-LILYPAD]  127.89,23.44 0 top
U$16  [LOGO-LILYPAD]  130.86,47.27 0 bottom
U$17  [LOGO-L-TINY]  158.03,20.58 0 bottom
U$18  [LOGO-L-TINY]  139.91,20.63 0 bottom
U$19  [LOGO-L-TINY]  149.09,20.69 0 bottom
U$20  [LOGO-L]  152.46,47.02 0 bottom
U$21  [LOGO-L]  162.65,46.64 0 bottom
U$22  [LOGO-LILYPAD]  181.23,23.44 0 top
U$23  [LOGO-LILYPAD]  184.2,47.27 0 bottom
U$24  [LOGO-L-TINY]  211.37,20.58 0 bottom
U$25  [LOGO-L-TINY]  193.25,20.63 0 bottom
U$26  [LOGO-L-TINY]  202.43,20.69 0 bottom
U$27  [LOGO-L]  205.8,47.02 0 bottom
U$28  [LOGO-L]  215.99,46.64 0 bottom
U$29  [LOGO-LILYPAD]  21.21,83.64 0 top
U$30  [LOGO-LILYPAD]  24.18,107.47 0 bottom
U$31  [LOGO-L-TINY]  51.35,80.78 0 bottom
U$32  [LOGO-L-TINY]  33.23,80.83 0 bottom
U$33  [LOGO-L-TINY]  42.41,80.89 0 bottom
U$34  [LOGO-L]  45.78,107.22 0 bottom
U$35  [LOGO-L]  55.97,106.84 0 bottom
U$36  [LOGO-LILYPAD]  74.55,83.64 0 top
U$37  [LOGO-LILYPAD]  77.52,107.47 0 bottom
U$38  [LOGO-L-TINY]  104.69,80.78 0 bottom
U$39  [LOGO-L-TINY]  86.57,80.83 0 bottom
U$40  [LOGO-L-TINY]  95.75,80.89 0 bottom
U$41  [LOGO-L]  99.12,107.22 0 bottom
U$42  [LOGO-L]  109.31,106.84 0 bottom
U$43  [LOGO-LILYPAD]  127.89,83.64 0 top
U$44  [LOGO-LILYPAD]  130.86,107.47 0 bottom
U$45  [LOGO-L-TINY]  158.03,80.78 0 bottom
U$46  [LOGO-L-TINY]  139.91,80.83 0 bottom
U$47  [LOGO-L-TINY]  149.09,80.89 0 bottom
U$48  [LOGO-L]  152.46,107.22 0 bottom
U$49  [LOGO-L]  162.65,106.84 0 bottom
U$50  [LOGO-LILYPAD]  181.23,83.64 0 top
U$51  [LOGO-LILYPAD]  184.2,107.47 0 bottom
U$52  [LOGO-L-TINY]  211.37,80.78 0 bottom
U$53  [LOGO-L-TINY]  193.25,80.83 0 bottom
U$54  [LOGO-L-TINY]  202.43,80.89 0 bottom
U$55  [LOGO-L]  205.8,107.22 0 bottom
U$56  [LOGO-L]  215.99,106.84 0 bottom

## Library data of the parts
BAT1-BAT8 = SparkFun-Electromechanical; PROD_ID: BATT-10373
BATB- BATB-1-BATB-15 BATT+ BATT+1-BATT+15 BUTTON- BUTTON-1-BUTTON-7 BUTTONS BUTTONS1-BUTTONS7 LED+1-LED+24 LED-1-LED-24 SLIDEOFF SLIDEOFF1-SLIDEOFF7 SLIDEON SLIDEON1-SLIDEON7 U$1-U$56 = LilyPad-Wearables
E$1 = SparkFun-Retired
E$7 E$8 FD1-FD16 LOGO1-LOGO16 = SparkFun-Aesthetics
LED1-LED24 = SparkFun-LED; PROD_ID: DIO-09955
MB1-MB80 MB+ MB+1-MB+7 MB- MB-1-MB-7 = Testing
R1-R24 = SparkFun-Resistors; PROD-ID: 13326
S1 S3 S4 S6 S7 S9 S10 S12 S13 S15 S16 S18 S19 S21 S22 S24 = SparkFun-Electromechanical; PROD_ID: SWCH-08179; SF_ID: COM-00597
S2 S5 S8 S11 S14 S17 S20 S23 = SparkFun-Electromechanical; PROD_ID: SWCH-08247

## Nets
BUTTON: BUTTONS.1 LED1.A LED+1.1 MB3.P$1 MB9.P$1 S2.1
BUTTON1: BUTTONS1.1 LED4.A LED+4.1 MB14.P$1 MB20.P$1 S5.1
BUTTON2: BUTTONS2.1 LED7.A LED+7.1 MB24.P$1 MB30.P$1 S8.1
BUTTON3: BUTTONS3.1 LED10.A LED+10.1 MB34.P$1 MB40.P$1 S11.1
BUTTON4: BUTTONS4.1 LED13.A LED+13.1 MB44.P$1 MB50.P$1 S14.1
BUTTON5: BUTTONS5.1 LED16.A LED+16.1 MB54.P$1 MB60.P$1 S17.1
BUTTON6: BUTTONS6.1 LED19.A LED+19.1 MB64.P$1 MB70.P$1 S20.1
BUTTON7: BUTTONS7.1 LED22.A LED+22.1 MB74.P$1 MB80.P$1 S23.1
GND: BAT1.NEGATIVE BATB-2.1 BATB-.1 LED-1.1 LED-2.1 LED-3.1 MB6.P$1 MB7.P$1 MB8.P$1 MB-.P$1 R1.2 R2.2 R3.2
GND1: BAT2.NEGATIVE BATB-1.1 BATB-3.1 LED-4.1 LED-5.1 LED-6.1 MB17.P$1 MB18.P$1 MB19.P$1 MB-1.P$1 R4.2 R5.2 R6.2
GND2: BAT3.NEGATIVE BATB-4.1 BATB-5.1 LED-7.1 LED-8.1 LED-9.1 MB27.P$1 MB28.P$1 MB29.P$1 MB-2.P$1 R7.2 R8.2 R9.2
GND3: BAT4.NEGATIVE BATB-6.1 BATB-7.1 LED-10.1 LED-11.1 LED-12.1 MB37.P$1 MB38.P$1 MB39.P$1 MB-3.P$1 R10.2 R11.2 R12.2
GND4: BAT5.NEGATIVE BATB-8.1 BATB-9.1 LED-13.1 LED-14.1 LED-15.1 MB47.P$1 MB48.P$1 MB49.P$1 MB-4.P$1 R13.2 R14.2 R15.2
GND5: BAT6.NEGATIVE BATB-10.1 BATB-11.1 LED-16.1 LED-17.1 LED-18.1 MB57.P$1 MB58.P$1 MB59.P$1 MB-5.P$1 R16.2 R17.2 R18.2
GND6: BAT7.NEGATIVE BATB-12.1 BATB-13.1 LED-19.1 LED-20.1 LED-21.1 MB67.P$1 MB68.P$1 MB69.P$1 MB-6.P$1 R19.2 R20.2 R21.2
GND7: BAT8.NEGATIVE BATB-14.1 BATB-15.1 LED-22.1 LED-23.1 LED-24.1 MB77.P$1 MB78.P$1 MB79.P$1 MB-7.P$1 R22.2 R23.2 R24.2
N$1: BAT1.POSITIVE@1 BAT1.POSITIVE@2 BAT1.POSITIVE@3 BAT1.POSITIVE@4 S1.2
N$2: BAT2.POSITIVE@1 BAT2.POSITIVE@2 BAT2.POSITIVE@3 BAT2.POSITIVE@4 S4.2
N$3: LED4.C R4.1
N$4: LED5.C R5.1
N$5: LED6.C R6.1
N$6: BAT3.POSITIVE@1 BAT3.POSITIVE@2 BAT3.POSITIVE@3 BAT3.POSITIVE@4 S7.2
N$7: LED7.C R7.1
N$8: LED8.C R8.1
N$9: LED9.C R9.1
N$10: BAT4.POSITIVE@1 BAT4.POSITIVE@2 BAT4.POSITIVE@3 BAT4.POSITIVE@4 S10.2
N$11: LED1.C R1.1
N$12: LED2.C R2.1
N$13: LED3.C R3.1
N$14: LED10.C R10.1
N$15: LED11.C R11.1
N$16: LED12.C R12.1
N$17: BAT5.POSITIVE@1 BAT5.POSITIVE@2 BAT5.POSITIVE@3 BAT5.POSITIVE@4 S13.2
N$18: LED13.C R13.1
N$19: LED14.C R14.1
N$20: LED15.C R15.1
N$21: BAT6.POSITIVE@1 BAT6.POSITIVE@2 BAT6.POSITIVE@3 BAT6.POSITIVE@4 S16.2
N$22: LED16.C R16.1
N$23: LED17.C R17.1
N$24: LED18.C R18.1
N$25: BAT7.POSITIVE@1 BAT7.POSITIVE@2 BAT7.POSITIVE@3 BAT7.POSITIVE@4 S19.2
N$26: LED19.C R19.1
N$27: LED20.C R20.1
N$28: LED21.C R21.1
N$29: BAT8.POSITIVE@1 BAT8.POSITIVE@2 BAT8.POSITIVE@3 BAT8.POSITIVE@4 S22.2
N$30: LED22.C R22.1
N$31: LED23.C R23.1
N$32: LED24.C R24.1
SWITCH: LED2.A LED3.A LED+2.1 LED+3.1 MB4.P$1 MB5.P$1 MB10.P$1 S3.2 SLIDEOFF.1
SWITCH1: LED5.A LED6.A LED+5.1 LED+6.1 MB12.P$1 MB15.P$1 MB16.P$1 S6.2 SLIDEOFF1.1
SWITCH2: LED8.A LED9.A LED+8.1 LED+9.1 MB22.P$1 MB25.P$1 MB26.P$1 S9.2 SLIDEOFF2.1
SWITCH3: LED11.A LED12.A LED+11.1 LED+12.1 MB32.P$1 MB35.P$1 MB36.P$1 S12.2 SLIDEOFF3.1
SWITCH4: LED14.A LED15.A LED+14.1 LED+15.1 MB42.P$1 MB45.P$1 MB46.P$1 S15.2 SLIDEOFF4.1
SWITCH5: LED17.A LED18.A LED+17.1 LED+18.1 MB52.P$1 MB55.P$1 MB56.P$1 S18.2 SLIDEOFF5.1
SWITCH6: LED20.A LED21.A LED+20.1 LED+21.1 MB62.P$1 MB65.P$1 MB66.P$1 S21.2 SLIDEOFF6.1
SWITCH7: LED23.A LED24.A LED+23.1 LED+24.1 MB72.P$1 MB75.P$1 MB76.P$1 S24.2 SLIDEOFF7.1
VCC: BATT+2.1 BATT+.1 BUTTON-.1 MB1.P$1 MB2.P$1 MB+.P$1 S1.1 S2.3 S3.3 SLIDEON.1
VCC1: BATT+1.1 BATT+3.1 BUTTON-1.1 MB11.P$1 MB13.P$1 MB+1.P$1 S4.1 S5.3 S6.3 SLIDEON1.1
VCC2: BATT+4.1 BATT+5.1 BUTTON-2.1 MB21.P$1 MB23.P$1 MB+2.P$1 S7.1 S8.3 S9.3 SLIDEON2.1
VCC3: BATT+6.1 BATT+7.1 BUTTON-3.1 MB31.P$1 MB33.P$1 MB+3.P$1 S10.1 S11.3 S12.3 SLIDEON3.1
VCC4: BATT+8.1 BATT+9.1 BUTTON-4.1 MB41.P$1 MB43.P$1 MB+4.P$1 S13.1 S14.3 S15.3 SLIDEON4.1
VCC5: BATT+10.1 BATT+11.1 BUTTON-5.1 MB51.P$1 MB53.P$1 MB+5.P$1 S16.1 S17.3 S18.3 SLIDEON5.1
VCC6: BATT+12.1 BATT+13.1 BUTTON-6.1 MB61.P$1 MB63.P$1 MB+6.P$1 S19.1 S20.3 S21.3 SLIDEON6.1
VCC7: BATT+14.1 BATT+15.1 BUTTON-7.1 MB71.P$1 MB73.P$1 MB+7.P$1 S22.1 S23.3 S24.3 SLIDEON7.1